# Altium PCB Filter_Bank_EVB.PcbDoc (part 1 of 2)
Units mil, origin at the board's own origin, x right, y up, seen from the top; angles counter-clockwise.
Board outline 1783.46 x 1173.23 mil, 4 copper layers (Top Layer, Mid-Layer 1, Mid-Layer 2, Bottom Layer), stack 62.205 mil thick; 71 components, 40 nets, 242 pads, 1145 vias.
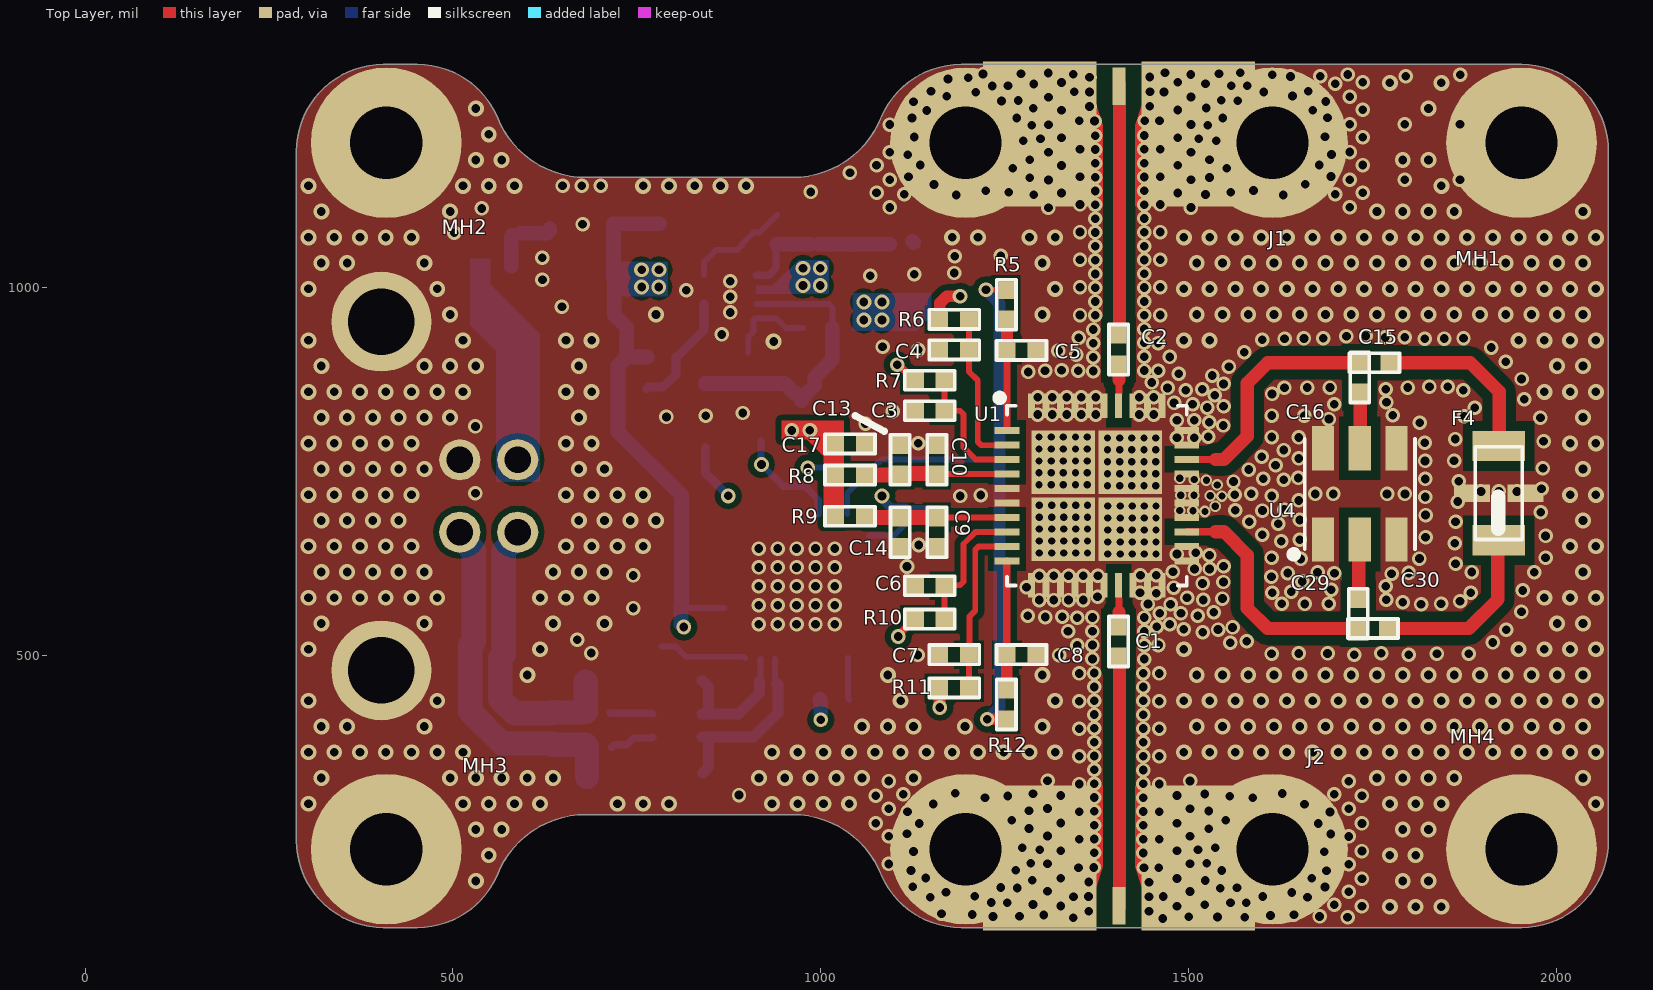
[diagram p0: Top Layer view]
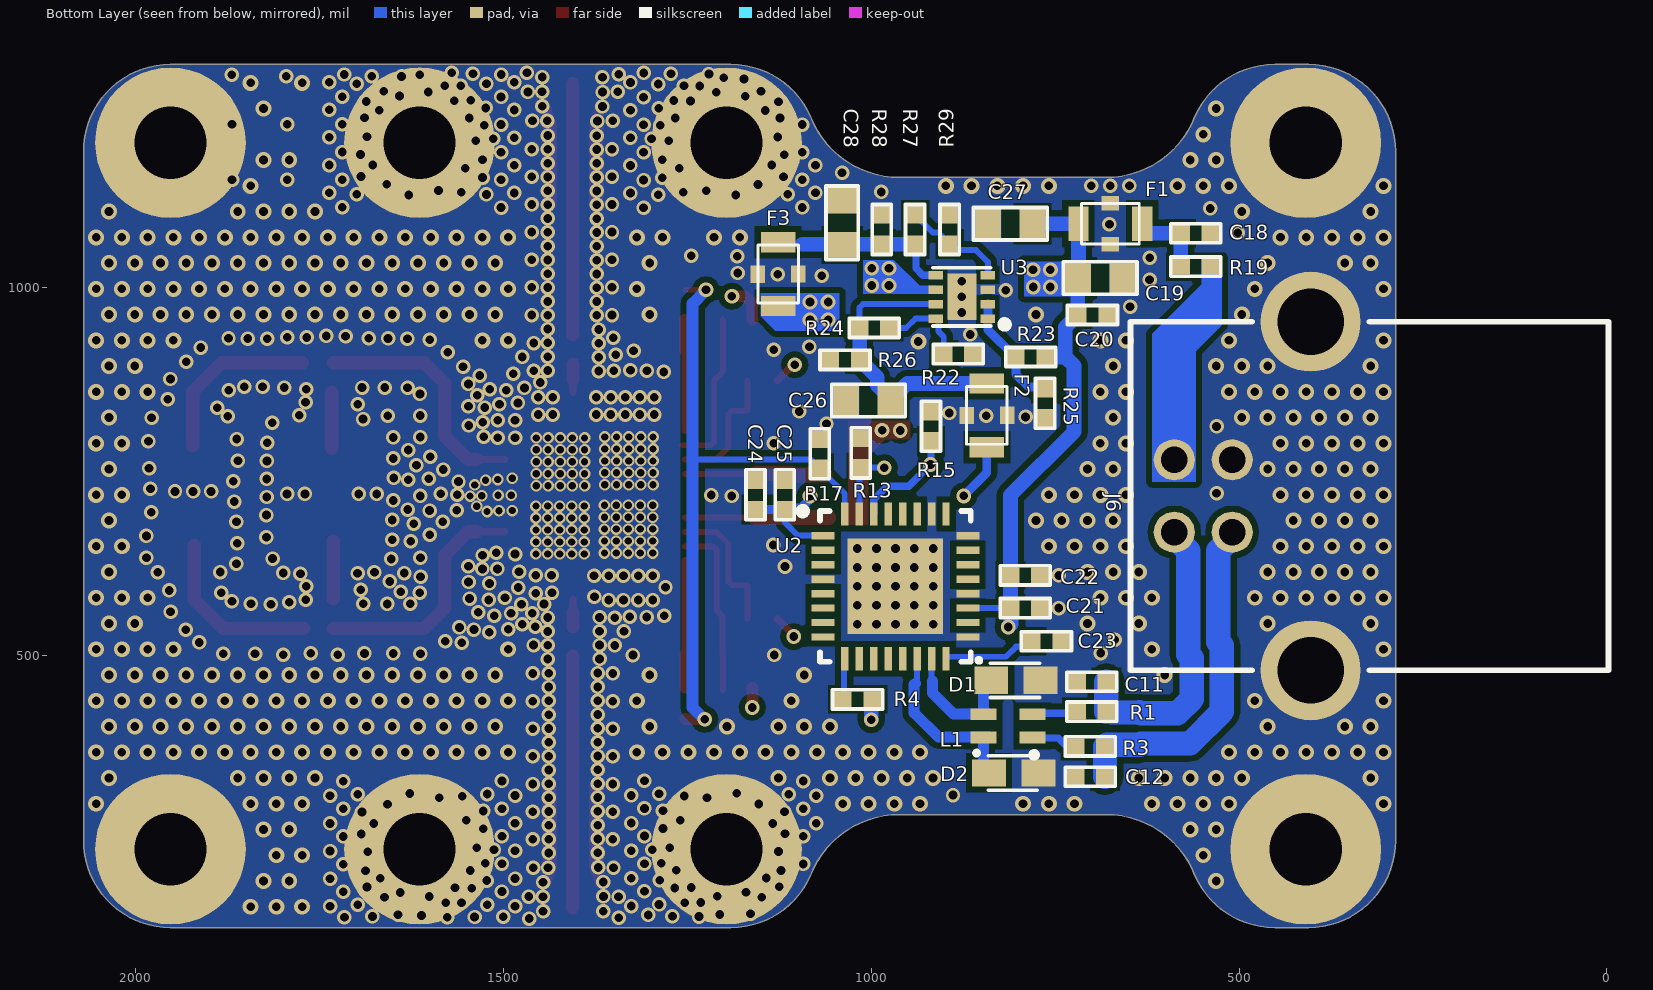
[diagram p1: Bottom Layer view, seen from below]
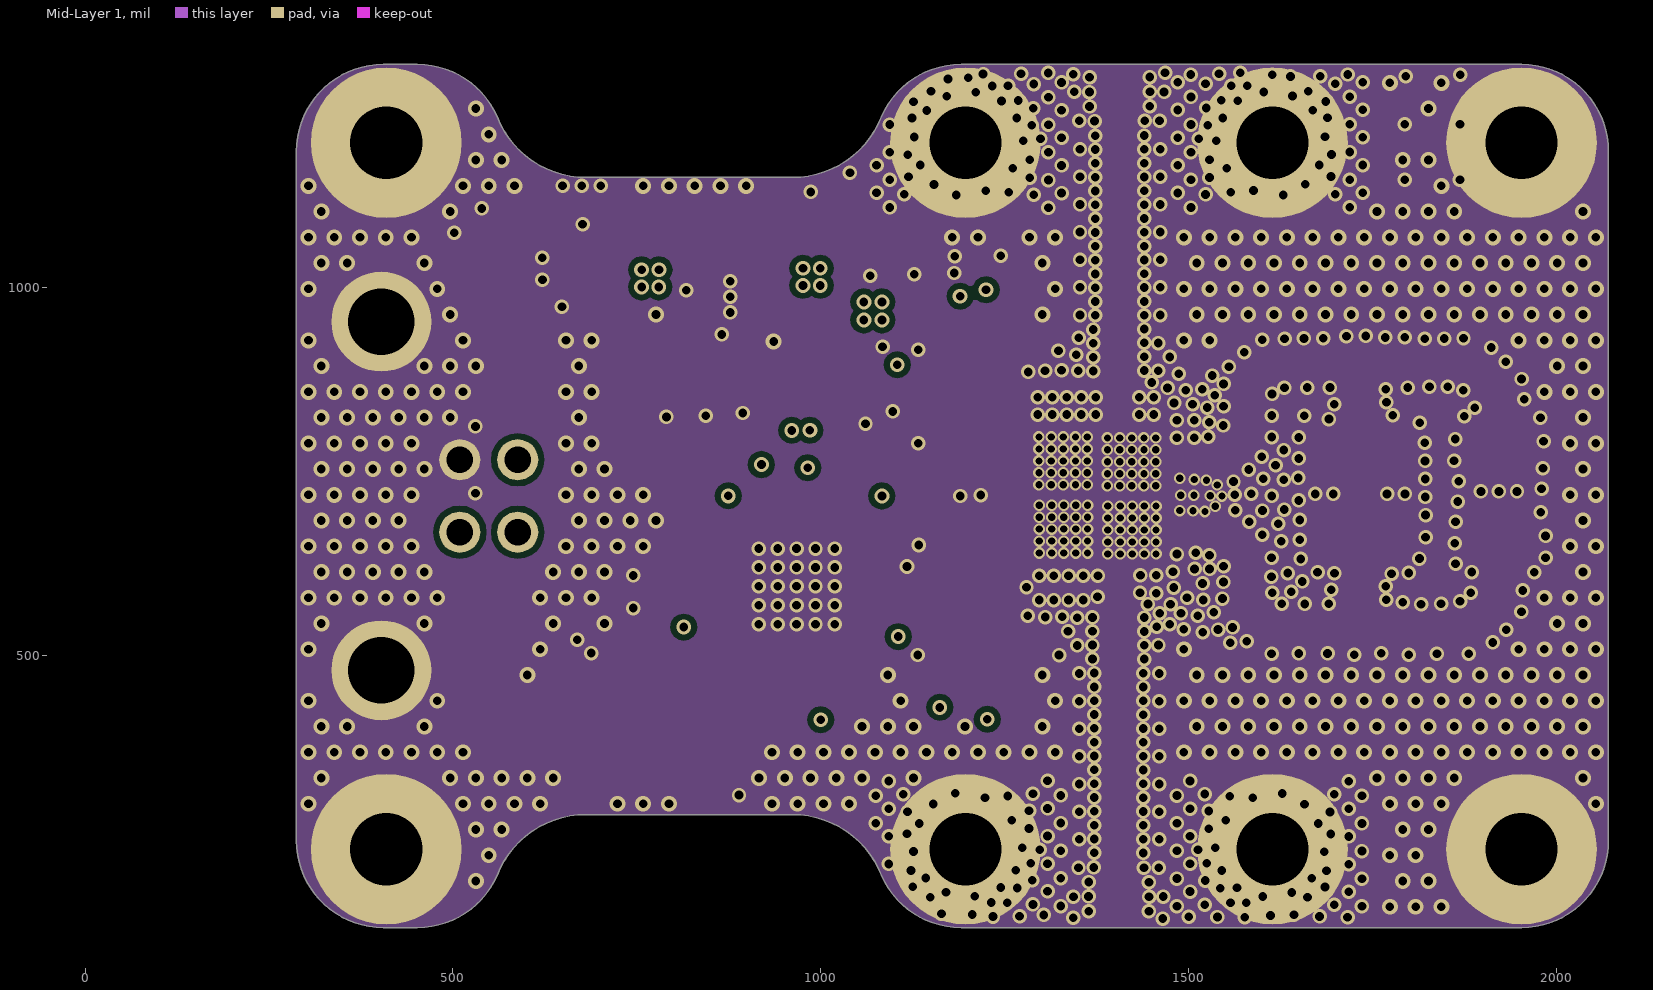
[diagram p2: Mid-Layer 1]
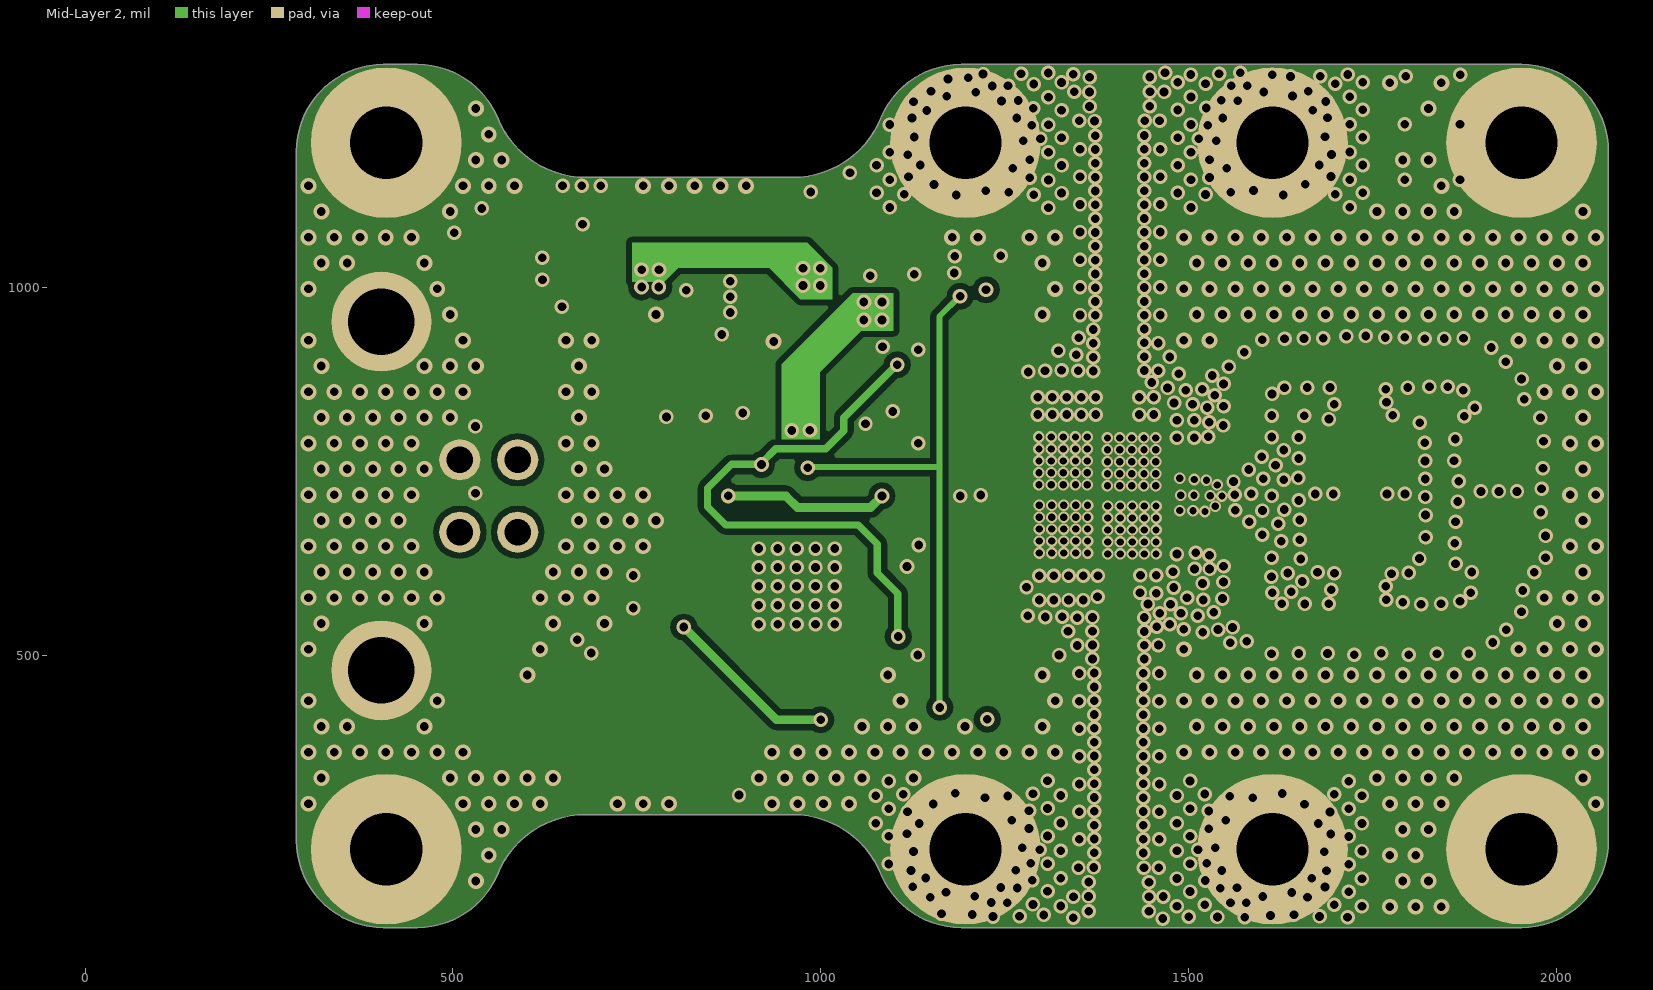
[diagram p3: Mid-Layer 2]
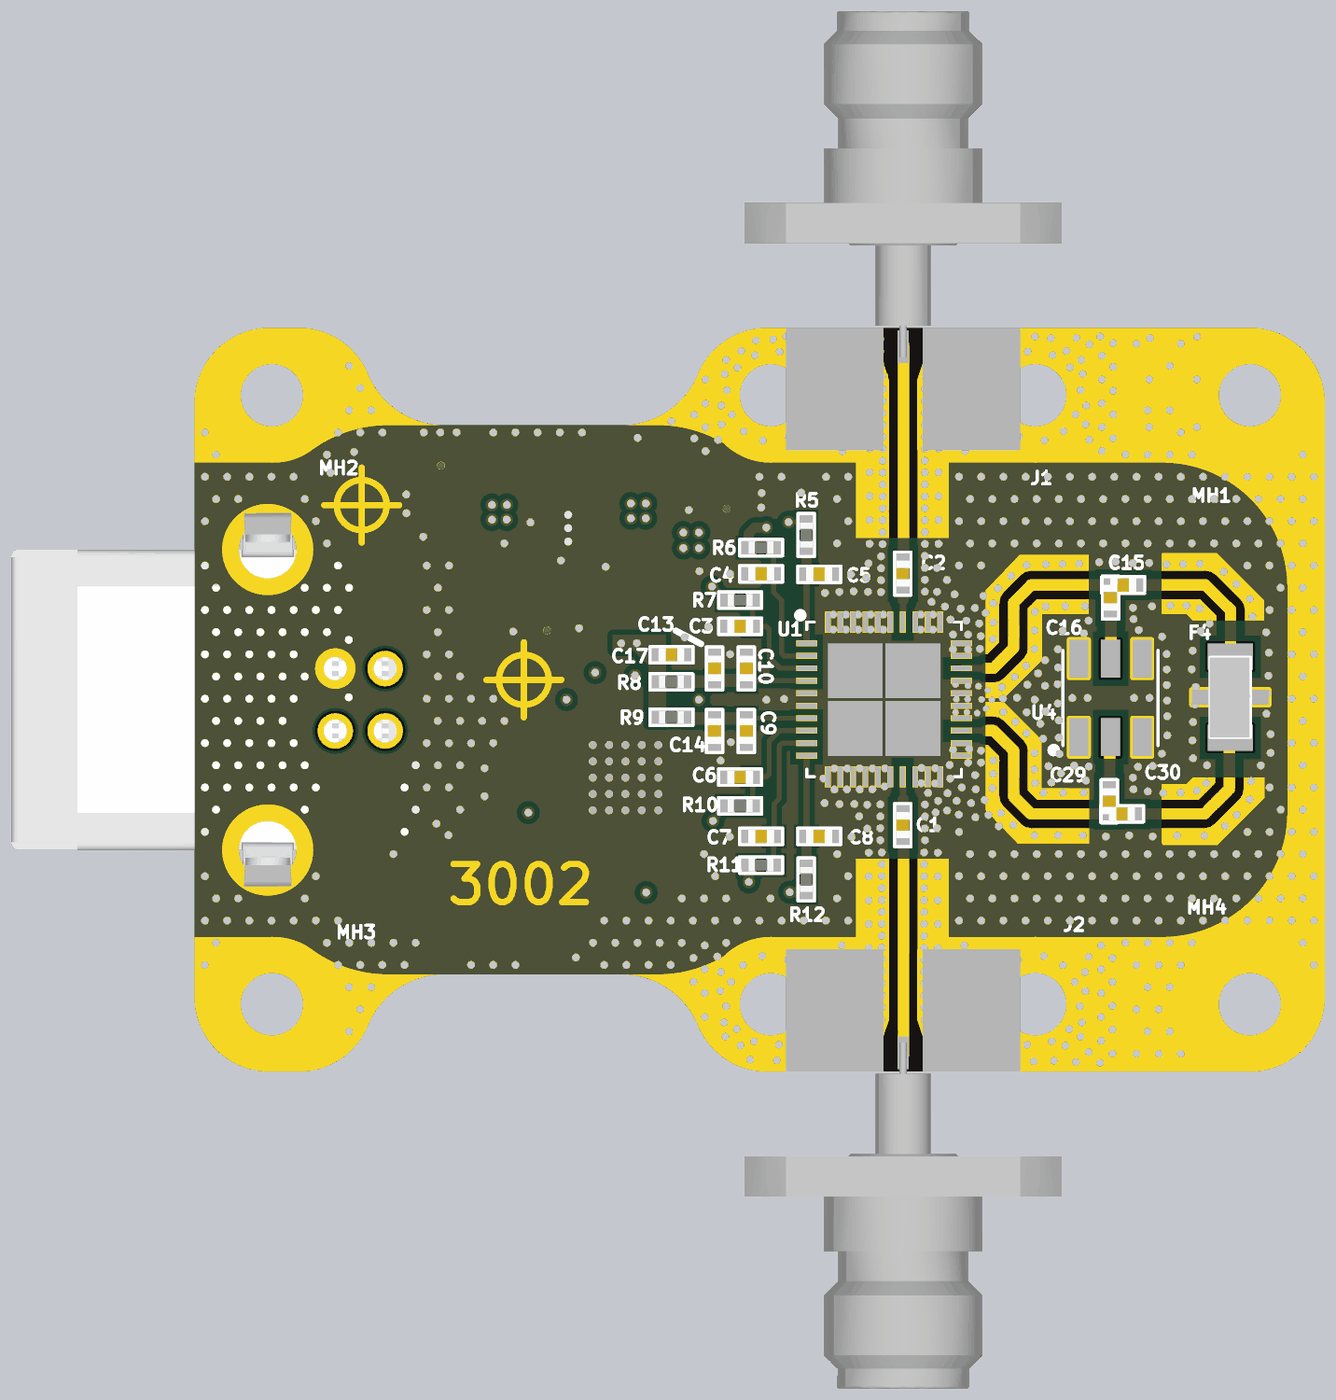
[diagram p5: 3D render of the assembled board from above, using the file's embedded part models]
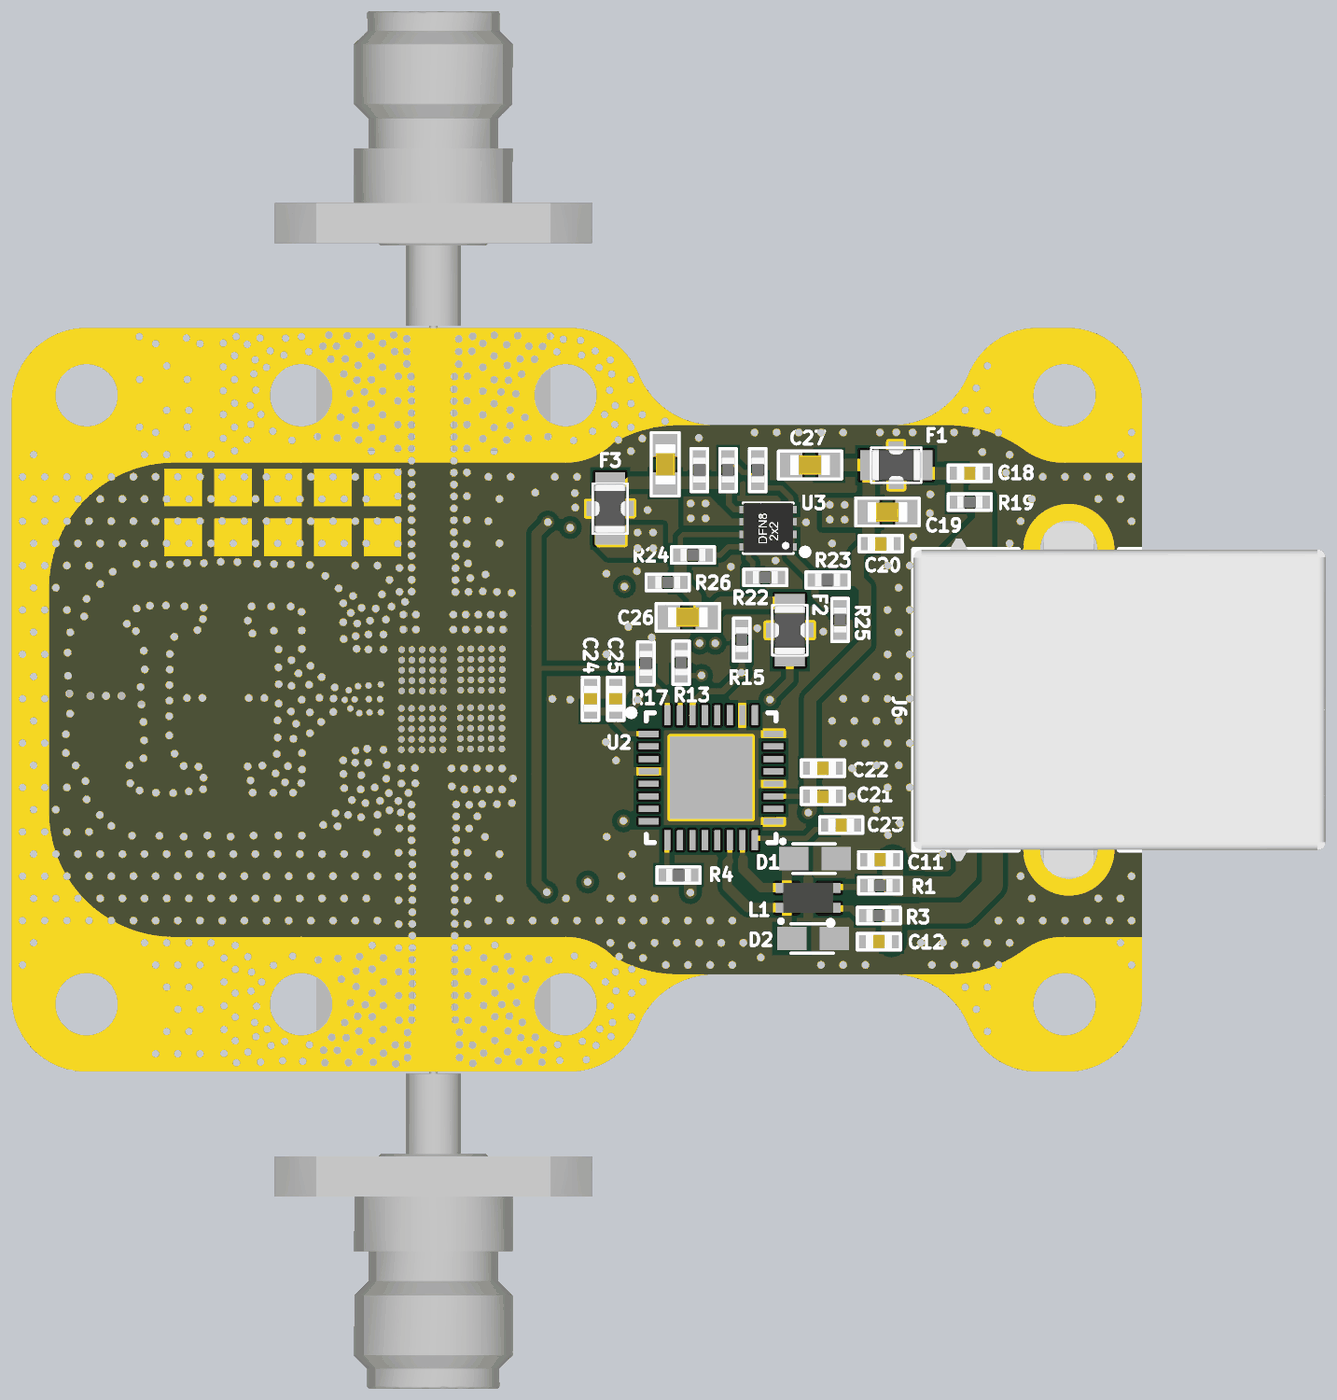
[diagram p6: 3D render of the assembled board from below, using the file's embedded part models]

## Layer stack, top to bottom
Top Solder: solder mask 0.4, Solder Resist, Dk 3.5
Top Layer: signal copper 1.378
Dielectric 1: core 8.6614, Core-021, Dk 4.1
Mid-Layer 1: signal copper 1.378
Dielectric 2: dielectric 39.3701, FR-4, Dk 4.8
Mid-Layer 2: signal copper 1.378
Dielectric 3: core 8.6614, Core-021, Dk 4.1
Bottom Layer: signal copper 1.378
Bottom Solder: solder mask 0.4, Solder Resist, Dk 3.5

## Board outline
405.51,129.92 451.85,129.92 ccw(c451.85,248.03) 560.1,200.79 cw(c681.1,153.54) 681.1,283.44 961.69,283.44 cw(c961.69,153.54) 1082.69,200.79 ccw(c1190.94,248.03) 1190.94,129.92 1484.25,129.92 1952.76,129.92 ccw(c1952.76,248.03) 2070.87,248.03 2070.87,1185.04 ccw(c1952.76,1185.04) 1952.76,1303.15 1952.75,1303.15 1190.94,1303.15 ccw(c1190.94,1185.04) 1082.69,1232.28 cw(c961.69,1279.53) 961.69,1149.63 681.1,1149.63 cw(c681.1,1279.53) 560.1,1232.28 ccw(c451.85,1185.04) 451.85,1303.15 405.51,1303.15 ccw(c405.51,1185.04) 287.4,1185.04 287.46,1090.55 287.46,248.03 287.4,248.03 ccw(c405.51,248.03)

## Design rules (kind name [scope] priority, off if disabled: settings)
Clearance rfconn [HasFootprint('60-02-9F2-113A')] p1: gap=30 ignorepadtopadclearanceinfootprint=FALSE
Clearance rfpath [InNet('RFAUX_1') Or  InNet('RFAUX_2') Or   InNet('RFAUX_3') Or InNet('RFAUX2_1') Or  InNet('RFAUX2_2') Or   InNet('RFAUX2_3') Or  InNet('RF1_1') Or InNet('RF1_2') Or InNet('RF2_1') Or   InNet('RF2_2')] p2: gap=13 ignorepadtopadclearanceinfootprint=FALSE
Clearance filterbankic [HasFootprint('40L-QFN-6X6-50P-MOD')] p3: gap=9 ignorepadtopadclearanceinfootprint=FALSE
Clearance ldo [HasFootprint('ADP125')] p4: gap=5.9 ignorepadtopadclearanceinfootprint=FALSE
Clearance general [All] p5: gap=8 ignorepadtopadclearanceinfootprint=FALSE
ComponentClearance [All] p1: gap=4 collisioncheckmode=3 verticalgap=4 showdistances=FALSE
DiffPairsRouting DiffPair_usb2DiffPairsRouting [InDifferentialPairClass('USB2')] p1: maxlimit=8 minlimit=8 mostfreqgap=8 toplayer_minwidth=30 toplayer_maxwidth=30 toplayer_prefwidth=30 midlayer1_minwidth=30 midlayer1_maxwidth=30 midlayer1_prefwidth=30 midlayer2_minwidth=30 midlayer2_maxwidth=30 midlayer2_prefwidth=30 bottomlayer_minwidth=30 bottomlayer_maxwidth=30 bottomlayer_prefwidth=30 substack1={16D1EDF4-5D03-4851-A8C4-48276263A34B} toplayer_{16d1edf4-5d03-4851-a8c4-48276263a34b}_minwidth=15 toplayer_{16d1edf4-5d03-4851-a8c4-48276263a34b}_maxwidth=15 toplayer_{16d1edf4-5d03-4851-a8c4-48276263a34b}_prefwidth=15 midlayer1_{16d1edf4-5d03-4851-a8c4-48276263a34b}_minwidth=15 midlayer1_{16d1edf4-5d03-4851-a8c4-48276263a34b}_maxwidth=15 midlayer1_{16d1edf4-5d03-4851-a8c4-48276263a34b}_prefwidth=15 midlayer2_{16d1edf4-5d03-4851-a8c4-48276263a34b}_minwidth=15 midlayer2_{16d1edf4-5d03-4851-a8c4-48276263a34b}_maxwidth=15 midlayer2_{16d1edf4-5d03-4851-a8c4-48276263a34b}_prefwidth=15 bottomlayer_{16d1edf4-5d03-4851-a8c4-48276263a34b}_minwidth=15 bottomlayer_{16d1edf4-5d03-4851-a8c4-48276263a34b}_maxwidth=15 bottomlayer_{16d1edf4-5d03-4851-a8c4-48276263a34b}_prefwidth=15 substack2={0C37A5F5-EA49-42A6-BF06-37DD608FF846} toplayer_{0c37a5f5-ea49-42a6-bf06-37dd608ff846}_minwidth=15 toplayer_{0c37a5f5-ea49-42a6-bf06-37dd608ff846}_maxwidth=15 toplayer_{0c37a5f5-ea49-42a6-bf06-37dd608ff846}_prefwidth=15 midlayer1_{0c37a5f5-ea49-42a6-bf06-37dd608ff846}_minwidth=15 midlayer1_{0c37a5f5-ea49-42a6-bf06-37dd608ff846}_maxwidth=15 midlayer1_{0c37a5f5-ea49-42a6-bf06-37dd608ff846}_prefwidth=15 midlayer2_{0c37a5f5-ea49-42a6-bf06-37dd608ff846}_minwidth=15 midlayer2_{0c37a5f5-ea49-42a6-bf06-37dd608ff846}_maxwidth=15 midlayer2_{0c37a5f5-ea49-42a6-bf06-37dd608ff846}_prefwidth=15 bottomlayer_{0c37a5f5-ea49-42a6-bf06-37dd608ff846}_minwidth=15 bottomlayer_{0c37a5f5-ea49-42a6-bf06-37dd608ff846}_maxwidth=15 bottomlayer_{0c37a5f5-ea49-42a6-bf06-37dd608ff846}_prefwidth=15 maxuncoupledlength=500
DiffPairsRouting DiffPair_usb2DiffPairsRouting_1 [InDifferentialPairClass('USB2')] p2: maxlimit=8 minlimit=8 mostfreqgap=8 toplayer_minwidth=33 toplayer_maxwidth=33 toplayer_prefwidth=33 midlayer1_minwidth=33 midlayer1_maxwidth=33 midlayer1_prefwidth=33 midlayer2_minwidth=33 midlayer2_maxwidth=33 midlayer2_prefwidth=33 bottomlayer_minwidth=33 bottomlayer_maxwidth=33 bottomlayer_prefwidth=33 substack1={16D1EDF4-5D03-4851-A8C4-48276263A34B} toplayer_{16d1edf4-5d03-4851-a8c4-48276263a34b}_minwidth=15 toplayer_{16d1edf4-5d03-4851-a8c4-48276263a34b}_maxwidth=15 toplayer_{16d1edf4-5d03-4851-a8c4-48276263a34b}_prefwidth=15 midlayer1_{16d1edf4-5d03-4851-a8c4-48276263a34b}_minwidth=15 midlayer1_{16d1edf4-5d03-4851-a8c4-48276263a34b}_maxwidth=15 midlayer1_{16d1edf4-5d03-4851-a8c4-48276263a34b}_prefwidth=15 midlayer2_{16d1edf4-5d03-4851-a8c4-48276263a34b}_minwidth=15 midlayer2_{16d1edf4-5d03-4851-a8c4-48276263a34b}_maxwidth=15 midlayer2_{16d1edf4-5d03-4851-a8c4-48276263a34b}_prefwidth=15 bottomlayer_{16d1edf4-5d03-4851-a8c4-48276263a34b}_minwidth=15 bottomlayer_{16d1edf4-5d03-4851-a8c4-48276263a34b}_maxwidth=15 bottomlayer_{16d1edf4-5d03-4851-a8c4-48276263a34b}_prefwidth=15 substack2={0C37A5F5-EA49-42A6-BF06-37DD608FF846} toplayer_{0c37a5f5-ea49-42a6-bf06-37dd608ff846}_minwidth=15 toplayer_{0c37a5f5-ea49-42a6-bf06-37dd608ff846}_maxwidth=15 toplayer_{0c37a5f5-ea49-42a6-bf06-37dd608ff846}_prefwidth=15 midlayer1_{0c37a5f5-ea49-42a6-bf06-37dd608ff846}_minwidth=15 midlayer1_{0c37a5f5-ea49-42a6-bf06-37dd608ff846}_maxwidth=15 midlayer1_{0c37a5f5-ea49-42a6-bf06-37dd608ff846}_prefwidth=15 midlayer2_{0c37a5f5-ea49-42a6-bf06-37dd608ff846}_minwidth=15 midlayer2_{0c37a5f5-ea49-42a6-bf06-37dd608ff846}_maxwidth=15 midlayer2_{0c37a5f5-ea49-42a6-bf06-37dd608ff846}_prefwidth=15 bottomlayer_{0c37a5f5-ea49-42a6-bf06-37dd608ff846}_minwidth=15 bottomlayer_{0c37a5f5-ea49-42a6-bf06-37dd608ff846}_maxwidth=15 bottomlayer_{0c37a5f5-ea49-42a6-bf06-37dd608ff846}_prefwidth=15 maxuncoupledlength=500
DiffPairsRouting DiffPair_usb1DiffPairsRouting [InDifferentialPairClass('USB1')] p3: maxlimit=8 minlimit=8 mostfreqgap=8 toplayer_minwidth=33 toplayer_maxwidth=33 toplayer_prefwidth=33 midlayer1_minwidth=33 midlayer1_maxwidth=33 midlayer1_prefwidth=33 midlayer2_minwidth=33 midlayer2_maxwidth=33 midlayer2_prefwidth=33 bottomlayer_minwidth=33 bottomlayer_maxwidth=33 bottomlayer_prefwidth=33 substack1={16D1EDF4-5D03-4851-A8C4-48276263A34B} toplayer_{16d1edf4-5d03-4851-a8c4-48276263a34b}_minwidth=15 toplayer_{16d1edf4-5d03-4851-a8c4-48276263a34b}_maxwidth=15 toplayer_{16d1edf4-5d03-4851-a8c4-48276263a34b}_prefwidth=15 midlayer1_{16d1edf4-5d03-4851-a8c4-48276263a34b}_minwidth=15 midlayer1_{16d1edf4-5d03-4851-a8c4-48276263a34b}_maxwidth=15 midlayer1_{16d1edf4-5d03-4851-a8c4-48276263a34b}_prefwidth=15 midlayer2_{16d1edf4-5d03-4851-a8c4-48276263a34b}_minwidth=15 midlayer2_{16d1edf4-5d03-4851-a8c4-48276263a34b}_maxwidth=15 midlayer2_{16d1edf4-5d03-4851-a8c4-48276263a34b}_prefwidth=15 bottomlayer_{16d1edf4-5d03-4851-a8c4-48276263a34b}_minwidth=15 bottomlayer_{16d1edf4-5d03-4851-a8c4-48276263a34b}_maxwidth=15 bottomlayer_{16d1edf4-5d03-4851-a8c4-48276263a34b}_prefwidth=15 substack2={0C37A5F5-EA49-42A6-BF06-37DD608FF846} toplayer_{0c37a5f5-ea49-42a6-bf06-37dd608ff846}_minwidth=15 toplayer_{0c37a5f5-ea49-42a6-bf06-37dd608ff846}_maxwidth=15 toplayer_{0c37a5f5-ea49-42a6-bf06-37dd608ff846}_prefwidth=15 midlayer1_{0c37a5f5-ea49-42a6-bf06-37dd608ff846}_minwidth=15 midlayer1_{0c37a5f5-ea49-42a6-bf06-37dd608ff846}_maxwidth=15 midlayer1_{0c37a5f5-ea49-42a6-bf06-37dd608ff846}_prefwidth=15 midlayer2_{0c37a5f5-ea49-42a6-bf06-37dd608ff846}_minwidth=15 midlayer2_{0c37a5f5-ea49-42a6-bf06-37dd608ff846}_maxwidth=15 midlayer2_{0c37a5f5-ea49-42a6-bf06-37dd608ff846}_prefwidth=15 bottomlayer_{0c37a5f5-ea49-42a6-bf06-37dd608ff846}_minwidth=15 bottomlayer_{0c37a5f5-ea49-42a6-bf06-37dd608ff846}_maxwidth=15 bottomlayer_{0c37a5f5-ea49-42a6-bf06-37dd608ff846}_prefwidth=15 maxuncoupledlength=500
DiffPairsRouting [All] p4: maxlimit=10 minlimit=10 mostfreqgap=10 toplayer_minwidth=15 toplayer_maxwidth=15 toplayer_prefwidth=15 midlayer1_minwidth=15 midlayer1_maxwidth=15 midlayer1_prefwidth=15 midlayer2_minwidth=15 midlayer2_maxwidth=15 midlayer2_prefwidth=15 bottomlayer_minwidth=15 bottomlayer_maxwidth=15 bottomlayer_prefwidth=15 substack1={16D1EDF4-5D03-4851-A8C4-48276263A34B} toplayer_{16d1edf4-5d03-4851-a8c4-48276263a34b}_minwidth=15 toplayer_{16d1edf4-5d03-4851-a8c4-48276263a34b}_maxwidth=15 toplayer_{16d1edf4-5d03-4851-a8c4-48276263a34b}_prefwidth=15 midlayer1_{16d1edf4-5d03-4851-a8c4-48276263a34b}_minwidth=15 midlayer1_{16d1edf4-5d03-4851-a8c4-48276263a34b}_maxwidth=15 midlayer1_{16d1edf4-5d03-4851-a8c4-48276263a34b}_prefwidth=15 midlayer2_{16d1edf4-5d03-4851-a8c4-48276263a34b}_minwidth=15 midlayer2_{16d1edf4-5d03-4851-a8c4-48276263a34b}_maxwidth=15 midlayer2_{16d1edf4-5d03-4851-a8c4-48276263a34b}_prefwidth=15 bottomlayer_{16d1edf4-5d03-4851-a8c4-48276263a34b}_minwidth=15 bottomlayer_{16d1edf4-5d03-4851-a8c4-48276263a34b}_maxwidth=15 bottomlayer_{16d1edf4-5d03-4851-a8c4-48276263a34b}_prefwidth=15 substack2={0C37A5F5-EA49-42A6-BF06-37DD608FF846} toplayer_{0c37a5f5-ea49-42a6-bf06-37dd608ff846}_minwidth=15 toplayer_{0c37a5f5-ea49-42a6-bf06-37dd608ff846}_maxwidth=15 toplayer_{0c37a5f5-ea49-42a6-bf06-37dd608ff846}_prefwidth=15 midlayer1_{0c37a5f5-ea49-42a6-bf06-37dd608ff846}_minwidth=15 midlayer1_{0c37a5f5-ea49-42a6-bf06-37dd608ff846}_maxwidth=15 midlayer1_{0c37a5f5-ea49-42a6-bf06-37dd608ff846}_prefwidth=15 midlayer2_{0c37a5f5-ea49-42a6-bf06-37dd608ff846}_minwidth=15 midlayer2_{0c37a5f5-ea49-42a6-bf06-37dd608ff846}_maxwidth=15 midlayer2_{0c37a5f5-ea49-42a6-bf06-37dd608ff846}_prefwidth=15 bottomlayer_{0c37a5f5-ea49-42a6-bf06-37dd608ff846}_minwidth=15 bottomlayer_{0c37a5f5-ea49-42a6-bf06-37dd608ff846}_maxwidth=15 bottomlayer_{0c37a5f5-ea49-42a6-bf06-37dd608ff846}_prefwidth=15 maxuncoupledlength=500
HoleSize [All] p1: absolutevalues=TRUE maxlimit=157.48 minlimit=1 maxpercent=80.000 minpercent=20.000
HoleToHoleClearance [All] p1: gap=6 allowstackedmicrovias=TRUE
MatchedLengths DiffPair_usb2MatchedLengths [InDifferentialPairClass('USB2')] p1: tolerance=1000 checknetsindiffpair=FALSE checkdiffpairvsdiffpair=TRUE checkxsignals=TRUE checkothers=TRUE
MatchedLengths DiffPair_usb2MatchedLengths_1 [InDifferentialPairClass('USB2')] p2: tolerance=1000 checknetsindiffpair=FALSE checkdiffpairvsdiffpair=TRUE checkxsignals=TRUE checkothers=TRUE
MatchedLengths DiffPair_usb1MatchedLengths [InDifferentialPairClass('USB1')] p3: tolerance=1000 checknetsindiffpair=FALSE checkdiffpairvsdiffpair=TRUE checkxsignals=TRUE checkothers=TRUE
PlaneConnect [All] p1: planeconnectstyle=Direct reliefexpansion=20 reliefentries=4 reliefconductorwidth=10 reliefairgap=10
PolygonConnect [All] p1: connectstyle=Direct reliefconductorwidth=10 reliefentries=4 polygonreliefangle="90 Angle" airgapwidth=10
RoutingVias [All] p1: holewidth=9 width=15 viastyle="Through Hole" minholewidth=9 minwidth=15 maxholewidth=50 maxwidth=50
SilkToSilkClearance [All] p1: silktosilkclearance=1
SilkToSolderMaskClearance [IsPad] p1: minsilkscreentomaskgap=1 clearancetoexposedcopper=TRUE
SolderMaskExpansion [All] p1: expansion=4 istentingtop=FALSE
Width [All] p1: maxlimit=50 minlimit=8 preferedwidth=8 substack1={16D1EDF4-5D03-4851-A8C4-48276263A34B} substack2={0C37A5F5-EA49-42A6-BF06-37DD608FF846}
23 further rules are at their usual default settings.

## Classes and differential pairs
differential pair class USB1: USB1
differential pair USB1: +USB1_P -USB1_N

## Components (designator, comment, footprint, x,y, rotation, side; value= is the part's Value field where it differs from the comment)
C1 "CAP" C0402 1405.02,518.8 r90 top value="100nF HF"
C2 "CAP" C0402 1405.02,915.56 r90 top value="100nF HF"
C3 "CAP" C0402 1148.34,832.39 r180 top value=DNI
C4 "CAP" C0402 1181.41,915.21 r180 top value=DNI
C5 "CAP" C0402 1273.1,914.37 r0 top value=DNI
C6 "CAP" C0402 1148.34,594.49 r0 top value=DNI
C7 "CAP" C0402 1181.41,500.99 r0 top value=DNI
C8 "CAP" C0402 1273.1,500.99 r180 top value=DNI
C9 "CAP" C0402 1158.07,667.2 r90 top value=100pF
C10 "CAP" C0402 1158.07,765.87 r90 top value=100pF
C11 "CAP" C0402 700.53,464 r180 bottom value=47pF
C12 "CAP" C0402 702.5,335 r180 bottom value=47pF
C13 "CAP" C0402 1107.93,765.87 r270 top value=10nF
C14 "CAP" C0402 1107.93,667.2 r90 top value=10nF
C15 "CAP" C0402 1752.87,897.64 r180 top value=DNP
C16 "CAP" C0402 1732.87,877.64 r90 top value=10nF
C17 "CAP" C0402 1039.96,787.4 r0 top value=100nF
C18 "CAP" C0402 559.05,1073.82 r0 bottom value=10nF
C19 "CAP" C0603 688.98,1012.8 r0 bottom value=10uF
C20 "CAP" C0402 699.49,962.6 r0 bottom value=100nF
C21 "CAP" C0402 790.79,564.24 r0 bottom value=10nF
C22 "CAP" C0402 790.79,608.53 r0 bottom value=100pF
C23 "CAP" C0402 762,519 r0 bottom value=100nF
C24 "CAP" C0402 1157.48,718.05 r270 bottom value=100pF
C25 "CAP" C0402 1117.67,718.05 r270 bottom value=10nF
C26 "CAP" C0603 1003.94,846.46 r180 bottom value=10uF
C27 "CAP" C0603 811.02,1086.62 r180 bottom value=10uF
C28 "CAP" C0603 1039.65,1087.91 r270 bottom value=10uF
C29 "CAP" C0402 1730.87,556.41 r270 top value=10nF
C30 "CAP" C0402 1750.87,536.41 r0 top value=DNP
D1 "PGB1010603" PGB1010603 905.17,378.98 r180 bottom
D2 "PGB1010603" PGB1010603 908.1,252.98 r180 bottom
F1 "NFM21PC475B1A3" NFM21PC 675.2,1086.62 r0 bottom
F2 "NFM21PC475B1A3" NFM21PC 843.06,826.2 r270 bottom
F3 "NFM21PC475B1A3" NFM21PC 1126.6,1018.16 r270 bottom
F4 "LFCN_HFCN" FV1206 1921.85,720.47 r90 top
J1 "60-02-9F2-113A" 60-02-9F2-113A 1405.52,1277.52 r90 top locked
J2 "60-02-9F2-113A" 60-02-9F2-113A 1405.53,155.55 r270 top locked
J6 "61400416121" 61400416121 322.83,716.54 r90 bottom locked
L1 "90Ohm" WE-CNSW_0805 814.3,403.95 r0 bottom
MH1 "M2" M2 1952.76,1196.85 r0 top locked
MH2 "M2" M2 409.45,1196.85 r0 top locked
MH3 "M2" M2 409.45,236.22 r0 top locked
MH4 "M2" M2 1952.76,236.22 r0 top locked
R1 "RES" R0402 700.53,423.4 r180 bottom value=0
R3 "RES" R0402 702.5,376.16 r180 bottom value=0
R4 "RES" R0402 1018.7,439.96 r0 bottom value=10k
R5 "RES" R0402 1252.56,976.38 r270 top value=0
R6 "RES" R0402 1181.41,956.54 r0 top value=0
R7 "RES" R0402 1148.34,873.77 r0 top value=0
R8 "RES" R0402 1039.96,744.87 r0 top value=0
R9 "RES" R0402 1039.96,688.98 r0 top value=0
R10 "RES" R0402 1148.34,549.21 r0 top value=0
R11 "RES" R0402 1181.41,455.71 r0 top value=0
R12 "RES" R0402 1252.56,433.07 r90 top value=0
R13 "RES" R0402 1014.47,775.1 r90 bottom value=10k
R15 "RES" R0402 918.92,811.39 r90 bottom value=10k
R17 "RES" R0402 1070.19,773.87 r90 bottom value=10k
R19 "RES" R0402 559.05,1028.37 r180 bottom value=0
R22 "RES" R0402 881.89,909.45 r180 bottom value=2k
R23 "RES" R0402 783.46,905.51 r0 bottom value=0
R24 "RES" R0402 995.94,944.88 r0 bottom value=17.4k
R25 "RES" R0402 763.78,842.52 r90 bottom value=DNP
R26 "RES" R0402 1035.75,901.58 r180 bottom value=3.3k
R27 "RES" R0402 940.58,1078.83 r270 bottom value=17.4k
R28 "RES" R0402 985.75,1078.83 r270 bottom value=3.3k
R29 "RES" R0402 893.7,1078.83 r90 bottom value=2k
U1 "Bypass LNA" 40L-QFN-6X6-50P-MOD 1375.43,717.03 r0 top
U2 "FT245RQ" QFN-32 967.25,593.65 r180 bottom
U3 "ADP225" ADP125 909.45,1016.73 r270 bottom
U4 "BFTC-415+" BFTC-415+ 1732.87,657.48 r180 top

## Footprints (in the part's own frame and the unit in brackets; to place one, negate y for a bottom-side part, rotate by r counter-clockwise, add the part's x,y. Pads: shape width x height; smd on the part's side, far side on the other; paste and mask are expansions set on the pad)
40L-QFN-6X6-50P-MOD [mm] "QFN, 24-Leads, Body 4.00x4.00mm, Pitch 0.50mm, Thermal Pad 2.2x2.2mm, IPC Medium Density"
  rect 0.85x0.24 smd paste-0.025 mask+0: 1(-3.1,2.25) 2(-3.1,1.75) 3(-3.1,1.25) 4(-3.1,0.75) 5(-3.1,0.25) 6(-3.1,-0.25) 7(-3.1,-0.75) 8(-3.1,-1.25) 9(-3.1,-1.75) 10(-3.1,-2.25) 21(3.1,-2.25) 22(3.1,-1.75) 23(3.1,-1.25) 24(3.1,-0.75) 25(3.1,-0.25) 26(3.1,0.25) 27(3.1,0.75) 28(3.1,1.25) 29(3.1,1.75) 30(3.1,2.25)
  rect 0.24x0.85 smd paste-0.025 mask+0: 11(-2.25,-3.1) 12(-1.75,-3.1) 13(-1.25,-3.1) 14(-0.75,-3.1) 15(-0.25,-3.1) 16(0.25,-3.1) 17(0.75,-3.1) 18(1.25,-3.1) 19(1.75,-3.1) 20(2.25,-3.1) 31(2.25,3.1) 32(1.75,3.1) 33(1.25,3.1) 34(0.75,3.1) 35(0.25,3.1) 36(-0.25,3.1) 37(-0.75,3.1) 38(-1.25,3.1) 39(-1.75,3.1) 40(-2.25,3.1)
  rect 2.195x2.195 smd paste+0 mask-0.025: 41(-1.152,1.151) 42(1.158,1.151) 43(1.158,-1.159) 44(-1.153,-1.159)
  silkscreen extent -3.48,-3.1 3.1,3.5, body extent -3.1,-3.1 3.1,3.1, height 1
60-02-9F2-113A [mm]
  rect 1.3x0.457 smd mask+0: 1(-0.1,0)
  round 5.2 hole 2.5: 2(-2.049,5.3) 2(-2.049,-5.3)
  rect 5x3.918 smd paste+0 mask+0: 2(-1.749,-2.743) 2(-1.749,2.743)
  Top Layer region: -0.762,-0.787 -1.448,-0.558 -4.242,-0.558 -4.242,-1.027 -4.243,-1.041 -1.015,-1.041
  Top Layer region: -0.762,0.788 -1.448,0.559 -4.242,0.559 -4.242,1.027 -4.243,1.041 -1.015,1.041
  body extent -0.52,-6.35 13.35,6.35, height 6.35
61400416121 [mm] "USB 2.0 Type B Horizontal"
  round 1.42 hole 0.92: 1(1.25,6.74) 2(-1.25,6.74) 3(-1.25,4.74) 4(1.25,4.74)
  round 3.45 hole 2.3: Shell(-6.02,2.03) Shell(6.02,2.03)
  silkscreen extent -6.02,-8.25 6.02,8.25, body extent -7.48,-8.25 7.48,8.25, height 11.15
ADP125 [mm]
  rect 0.3x0.5 smd mask-0.025: 1(1.5,1.725) 2(1,1.725) 3(0.5,1.725) 4(0,1.725) 5(0,-0.075) 6(0.5,-0.075) 7(1,-0.075) 8(1.5,-0.075)
  rect 1.6x1 smd mask-0.025: 9(0.75,0.825)
  silkscreen extent -0.25,-0.18 1.82,2.42, body extent -0.25,-0.19 1.75,1.83, height 0.95
BFTC-415+ [mil]
  rect 30x60 smd: 1(50,0) 2(0,0) 3(-50,0) 4(-50,-124) 5(0,-124) 6(50,-124)
  silkscreen extent -75,-137 95,25
C0402 [mil]
  rect 24x22 smd mask+3: 1(-20,0) 2(20,0)
  Top Layer pour cut-out: -8,11 8,11 8,-11 -8,-11
  silkscreen extent -34,-13 34,13, body extent -21,-11 21,11, height 24
C0603 [mil]
  rect 35x40 smd: 1(-30,0) 2(30,0)
  Top Layer pour cut-out: -12,20 12,20 12,-20 -12,-20
  silkscreen extent -50,-22 50,22, body extent -31,-15 31,16, height 31
FV1206 [mil]
  rect 41x71 smd: 1(-64,0) 3(64,0)
  rect 24x49 smd: 2(0,-36.5) 4(0,36.5)
  silkscreen extent -63,-32 63,32, body extent -63,-31 63,32, height 37
M2 [mm]
  round 5.2 hole 2.5: 1(0,0)
NFM21PC [mm]
  rect 0.7x1.2 smd: 1(-1.1,0) 3(1.1,0)
  rect 0.6x0.5 smd: 2(0.005,-0.7) 4(-0.005,0.7)
  silkscreen extent -1,-0.7 1,0.7, body extent -1,-0.62 1,0.63, height 0.85
PGB1010603 [mil]
  rect 46x37 smd paste+0 mask+0: 1(68.17,87.02) 2(135.17,87.02)
  silkscreen extent 48,64 134,117
QFN-32 [mm] "32-Pin QFN 0.5 mm Pitch"
  rect 0.8x0.25 smd: 1(-2.5,1.75) 2(-2.5,1.25) 3(-2.5,0.75) 4(-2.5,0.25) 5(-2.5,-0.25) 6(-2.5,-0.75) 7(-2.5,-1.25) 8(-2.5,-1.75) 17(2.5,-1.75) 18(2.5,-1.25) 19(2.5,-0.75) 20(2.5,-0.25) 21(2.5,0.25) 22(2.5,0.75) 23(2.5,1.25) 24(2.5,1.75)
  rect 0.25x0.8 smd: 9(-1.75,-2.5) 10(-1.25,-2.5) 11(-0.75,-2.5) 12(-0.25,-2.5) 13(0.25,-2.5) 14(0.75,-2.5) 15(1.25,-2.5) 16(1.75,-2.5) 25(1.75,2.5) 26(1.25,2.5) 27(0.75,2.5) 28(0.25,2.5) 29(-0.25,2.5) 30(-0.75,2.5) 31(-1.25,2.5) 32(-1.75,2.5)
  rect 3.3x3.3 smd: 33(0,0)
  silkscreen extent -3.33,-2.6 2.6,2.72, body extent -2.58,-2.58 2.58,2.58, height 0.8
R0402 [mil]
  rect 24x22 smd mask+3: 1(-20,0) 2(20,0)
  Top Layer pour cut-out: -8,11 8,11 8,-11 -8,-11
  silkscreen extent -34,-13 34,13, body extent -20,-10 20,10, height 10
WE-CNSW_0805 [mm] "SMT Common Mode Line Filter, 4-leads, body 2x1.2mm"
  rect 0.9x0.4 smd: 1(-0.85,0.4) 2(0.85,0.4) 3(0.85,-0.4) 4(-0.85,-0.4)
  silkscreen extent -1,0.9 -0.8,1.1, body extent -1,-0.6 1,0.6, height 1.19

## Part data
C1 C2 C3 C4 C5 C6 C7 C8 C9 C10 C11 C12 C13 C14 C15 C16 C17 C18 C19 C20 C21 C22 C23 C24 C25 C26 C27 C28 C29 C30: "Capacitor"
F1 F2 F3: "CAP FEEDTHRU 4.7UF 20% 10V 0805"
L1: library part 744231091, "WE-CNSW SMT Common Mode Line Filter, size 0805, 90Ohm, 0.37A, 50V", DC Resistance max.=0.3Ohm, Insulation Test Voltage=125VAC, Manufacturer="Wurth Elektronik", Operating Temperature="-40 to +125degC", Rated Current=0.37A, Rated Voltage=50V, ComponentLink1Description=Manufacturer, ComponentLink1URL=http://www.we-online.de, ComponentLink2Description=Datasheet, ComponentLink2URL=https://www.we-online.com/catalog/datasheet/744231091.pdf, Impedance=90Ohm, Impedance Test Condition=100MHz, Manufacturer Part Number=744231091, Mounting Technology=SMT, Packaging="Tape and Reel", Published Date="April 2020", Size=0805, Winding Style=bifiliar
R1 R3 R4 R5 R6 R7 R8 R9 R10 R11 R12 R13 R15 R17 R19 R22 R23 R24 R25 R26 R27 R28 R29: "Resistor"
U1: library part Filter_Bank
J6: ComponentLink1Description=Manufacturer, ComponentLink1URL=http://www.we-online.de, ComponentLink2Description=Datasheet, ComponentLink2URL=https://katalog.we-online.com/em/datasheet/61400416121.pdf

## Via types
v1: diameter 19.68, hole 11.81, Top Layer to Bottom Layer, tented both sides, 562 vias
v2: diameter 21.68, hole 11.81, Top Layer to Bottom Layer, tented both sides, 377 vias
v3: diameter 15.75, hole 9.84, Top Layer to Bottom Layer, tented both sides, 112 vias
v4: diameter 19.68/19.68/19.68/19.68 (per signal layer), hole 11.81, Top Layer to Bottom Layer, tented both sides, 66 vias
v5: diameter 20.08, hole 11.81, Top Layer to Bottom Layer, tented both sides, 28 vias

## Nets (pads, with @x,y where several pads share a name; then routed paths per layer and width w, separated by ;. In a path a pad name is that pad's centre, name@x,y a point inside that pad or via, vN(x,y) a via of type N, cw(c..) or ccw(c..) an arc to the next point about the centre after c; other vN are vias at no path point)
D_N: D1.1 L1.3 U2.15 | length 186.4
  Bottom Layer w8: 918.03,464.79 U2.15@918.03,495.23
  Bottom Layer w15: L1.3@838.58,420.28 L1.3@847.77,420.28 ; D1.1@838.94,466 847.77,457.17 L1.3@847.77,420.28 ; L1.3@847.77,419.7 L1.3@847.77,420.28 ; 916.94,464.79 916.94,449 888.21,420.28 L1.3@847.77,420.28
D_P: D2.1 L1.2 U2.14 | length 239.6
  Bottom Layer w8: 937.72,464.79 U2.14@937.72,495.23
  Bottom Layer w15: L1.2@838.58,388.78 908.72,388.78 941.79,421.85 941.79,460.03 939.94,461.88 ; D2.1@839.94,340 847.77,347.83 L1.2@847.77,388.2